# EAGLE board Ej1_EM (EAGLE 9.7.0)

Size 69.97 x 53.47 mm. Coordinates in mm from the lower left corner, seen from the top.
Outline: 0,0 69.97,0 69.97,53.48 0,53.48 0,0
Copper layers (1*16): Top 0.035mm / dielectric 1.5mm / Bottom 0.035mm
Design rules "default": minimum track width 6mil, minimum drill 0.35mm, track to track 6mil, track to pad 6mil, pad to pad 6mil, via to via 6mil, smd to smd 6mil, copper to edge 40mil, drill to drill 6mil, minimum pad ring 10mil, minimum via ring 8mil, stop-mask expansion 4mil, vias tented up to drill 0mil, thermal gap 10mil

## Footprints (pad centres in the part's own frame; a part is rotated, then mirrored left to right if it is on the bottom)
LEDRD254W60D565H860B = drill 0.981 pad 1.581: 1 -1.27,0; 2 1.27,0
BATTERY-GENERIC = drill 1.118 pad 3.15 octagon: + 2.54,0; - -2.54,0
RESAD1016W63L850D250B = drill 0.83 pad 1.43: 1 -5.08,0; 2 5.08,0

## Placement (x,y rotation side)
DLED  RED  [LEDRD254W60D565H860B]  63.91,16.59 180 top
PFUENTE_ENERGIA  BATTERYGENERIC  [BATTERY-GENERIC]  8.26,45.22 180 top
RRESISTENCIA  10k  [RESAD1016W63L850D250B]  62.64,8.97 90 top

## Library data of the parts
DLED = Tinkercad; CATEGORY: Opto-Electronic; SUB-CATEGORY: LED; VALUE: LED_RED
PFUENTE_ENERGIA RRESISTENCIA = Tinkercad

## Nets
DLED_C: DLED.2 RRESISTENCIA.2
PFUENTE_ENERGIA-: PFUENTE_ENERGIA.- RRESISTENCIA.1

## Tracks (layer width: path | path; a pad name or v marks a point on that pad's centre or on a via)
DLED_C  (1 unrouted)
PFUENTE_ENERGIA-  (1 unrouted)